# Altium PCB MAX96724_COUPON.PcbDoc (part 3 of 3)
Units mm, origin at the board's own origin, x right, y up, seen from the top; angles counter-clockwise.
Board outline 95 x 90 mm, 4 copper layers (TOP, INT1, INT2, BOT), stack 1.586 mm thick; 171 components, 127 nets, 532 pads, 121 vias.
Unrouted connection lines stored in the file: 1.
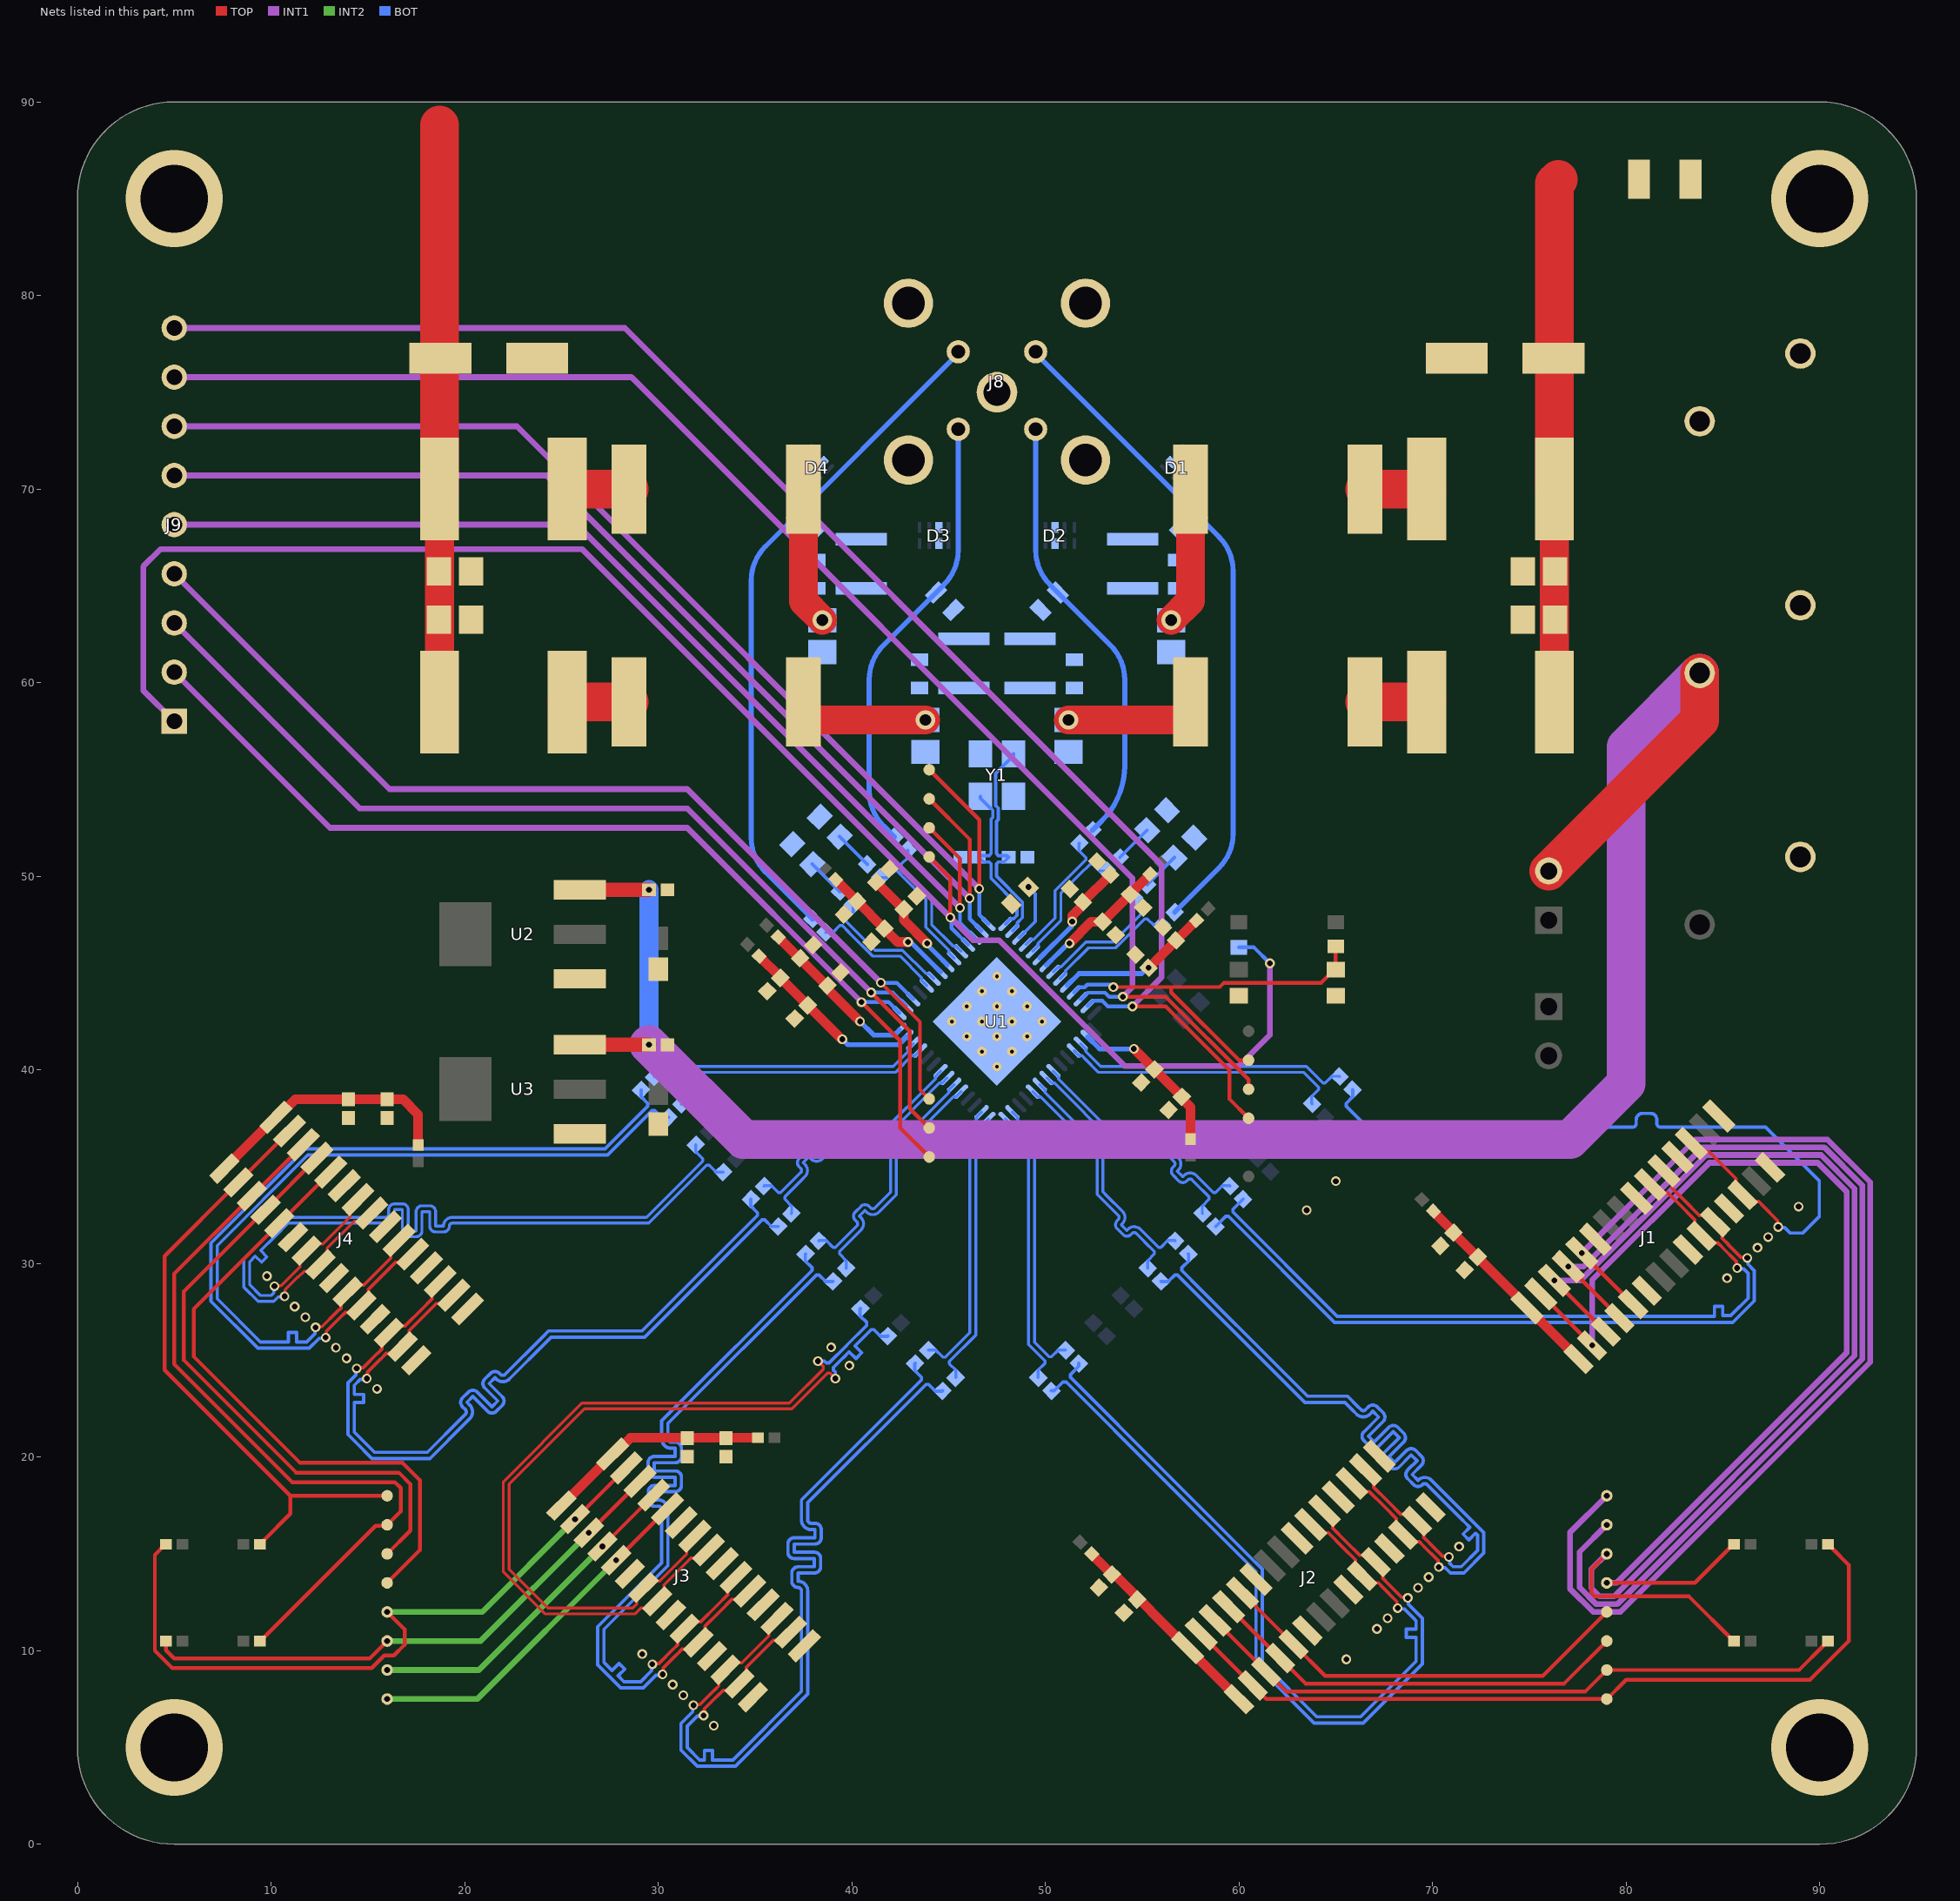
[diagram p4: the nets of this part, all layers, seen from the top]

## Via types
v1: diameter 0.5, hole 0.3, TOP to BOT, 75 vias
v2: diameter 0.5, hole 0.3, TOP to BOT, tented both sides, 22 vias
v3: diameter 0.5, hole 0.2, TOP to BOT, 16 vias
v4: diameter 1, hole 0.6, TOP to BOT, 4 vias
v5: diameter 5, hole 3.5, TOP to BOT, 4 vias

## Nets (pads, with @x,y where several pads share a name; then routed paths per layer and width w, separated by ;. In a path a pad name is that pad's centre, name@x,y a point inside that pad or via, vN(x,y) a via of type N, cw(c..) or ccw(c..) an arc to the next point about the centre after c; other vN are vias at no path point) (continued)
CSI0_D0_P: C14.2 J1.3 | length 39.2
  TOP w0.172: J1.3@83.371,36.2 83.813,35.758 84.116,35.758 84.133,35.775 84.275,35.775 85.669,34.381 85.669,34.239 85.652,34.222 85.652,33.919 J1.3@86.023,33.548 86.394,33.177 86.697,33.177 86.714,33.194 86.856,33.194 87.069,32.981 87.069,32.971 87.82,32.22 87.82,31.923 v1(87.859,31.884)
  BOT w0.172: C14.2@65.87,38.98 65.885,38.964 65.885,38.611 65.54,38.266 65.54,38.123 66.614,37.049 80.1,37.049 80.347,37.049 ccw(c80.347,37.221) 80.52,37.221 80.52,37.426 cw(c80.842,37.426) 80.842,37.749 81.268,37.749 cw(c81.268,37.426) 81.591,37.426 81.591,37.221 ccw(c81.763,37.221) 81.763,37.049 84.2,37.049 87.201,37.049 88.575,35.675 89.975,34.275 89.975,32.413 89.137,31.575 88.465,31.575 88.195,31.845 87.898,31.845 v1(87.859,31.884)
CSI0_D1_N: C17.2 J1.5 | length 39.9
  TOP w0.172: J1.5@81.957,34.786 82.399,34.344 82.399,34.041 82.382,34.024 82.382,33.881 83.024,33.24 83.775,32.488 83.918,32.488 83.935,32.505 84.238,32.505 J1.5@84.609,32.134 84.98,31.763 84.98,31.46 84.963,31.443 84.963,31.3 85.27,30.993 85.27,30.983 85.927,30.327 86.224,30.327 v1(86.263,30.288)
  BOT w0.172: C17.2@58.799,31.909 59.32,32.43 59.463,32.43 64.943,26.95 85.506,26.95 86.625,28.069 86.625,29.628 86.301,29.952 86.301,30.249 v1(86.263,30.288)
CSI0_D1_P: C16.2 J1.6 | length 39.8
  TOP w0.172: J1.6@81.25,34.078 81.692,33.636 81.994,33.636 82.011,33.653 82.154,33.653 82.701,33.106 83.547,32.26 83.547,32.117 83.53,32.1 83.53,31.798 J1.6@83.902,31.427 84.273,31.056 84.575,31.056 84.592,31.073 84.735,31.073 84.948,30.86 84.948,30.85 85.699,30.099 85.699,29.802 v1(85.738,29.763)
  BOT w0.172: C16.2@60.213,33.323 59.691,32.801 59.691,32.658 65.077,27.272 83.7,27.272 84.561,27.272 84.561,27.79 84.987,27.79 84.987,27.314 85.414,27.314 85.5,27.4 86.303,28.203 86.303,29.495 86.073,29.724 85.776,29.724 v1(85.738,29.763)
CSI0_D2_N: C19.2 J2.2 | length 39.3
  TOP w0.172: J2.2@66.541,19.344 66.983,18.902 66.983,18.6 66.966,18.583 66.966,18.44 67.647,17.759 68.359,17.047 68.502,17.047 68.519,17.064 68.821,17.064 J2.2@69.192,16.692 69.564,16.321 69.564,16.019 69.547,16.002 69.547,15.859 69.854,15.552 69.854,15.542 70.511,14.885 70.808,14.885 v1(70.846,14.846)
  BOT w0.172: C19.2@55.97,29.08 55.985,29.065 56.339,29.065 56.684,29.41 56.827,29.41 57.818,28.418 61.568,24.668 63.415,22.821 65.473,22.821 65.897,22.397 66.025,22.269 66.072,22.222 ccw(c66.422,22.572) 66.772,22.222 66.917,22.367 67.218,22.066 66.457,21.305 ccw(c66.684,21.076) 66.457,20.847 ; 66.457,20.847 66.757,20.547 ccw(c66.986,20.774) 67.154,20.499 67.166,20.499 67.976,21.308 68.277,21.007 ; 68.276,21.006 67.516,20.246 ccw(c67.743,20.017) 67.516,19.788 67.816,19.489 ccw(c68.044,19.716) 68.212,19.44 68.225,19.44 68.898,20.114 69.2,19.812 68.719,19.331 ccw(c68.947,19.103) 68.72,18.875 69.02,18.575 ccw(c69.248,18.802) 69.476,18.573 ; 69.476,18.574 cw(c69.598,18.452) 69.721,18.573 71.119,17.175 71.247,17.047 71.56,16.734 71.621,16.673 71.923,16.371 71.577,16.026 71.879,15.724 72.224,16.07 72.264,16.03 72.325,15.969 72.325,15.175 71.488,14.338 71.057,14.338 70.885,14.511 70.885,14.808 v1(70.846,14.846)
CSI0_D2_P: C18.2 J2.3 | length 39.4
  TOP w0.172: J2.3@65.834,18.637 66.276,18.195 66.578,18.195 66.595,18.212 66.738,18.212 67.513,17.437 68.131,16.819 68.131,16.676 68.114,16.659 68.114,16.357 J2.3@68.485,15.985 68.857,15.614 69.159,15.614 69.176,15.631 69.319,15.631 69.531,15.418 69.531,15.408 70.283,14.657 70.283,14.36 v1(70.321,14.321)
  BOT w0.172: C18.2@57.384,30.494 57.399,30.479 57.399,30.126 57.055,29.781 57.055,29.638 58.046,28.646 61.796,24.896 63.549,23.144 65.606,23.144 66.125,22.625 66.253,22.497 66.3,22.45 ccw(c66.422,22.572) 66.544,22.45 66.689,22.595 cw(c66.917,22.367) 67.145,22.595 67.446,22.294 cw(c67.218,22.066) 67.493,21.898 67.493,21.885 66.684,21.076 66.986,20.774 ; 66.986,20.775 67.748,21.536 cw(c67.976,21.308) 68.204,21.536 68.505,21.235 cw(c68.277,21.007) 68.552,20.839 68.552,20.826 67.743,20.017 68.044,19.716 68.67,20.341 cw(c68.898,20.114) 69.126,20.341 69.428,20.04 cw(c69.2,19.812) 69.428,19.584 68.947,19.103 69.248,18.802 ; 69.249,18.803 cw(c69.598,18.452) 69.893,18.849 69.901,18.849 69.947,18.803 ; 69.948,18.802 71.347,17.403 71.475,17.275 72.4,16.35 72.647,16.103 72.647,15.041 71.622,14.016 70.924,14.016 70.657,14.283 70.36,14.283 v1(70.321,14.321)
CSI0_D3_N: C23.2 J2.5 | length 41.2
  TOP w0.172: J2.5@64.419,17.223 64.861,16.781 64.861,16.478 64.844,16.461 64.844,16.319 65.525,15.638 66.238,14.925 66.38,14.925 66.397,14.942 66.7,14.942 J2.5@67.071,14.571 67.442,14.2 67.442,13.897 67.425,13.88 67.425,13.738 67.732,13.431 67.732,13.42 68.389,12.764 68.686,12.764 v1(68.725,12.725)
  BOT w0.172: C23.2@50.313,23.423 50.456,23.423 50.906,23.874 51.083,23.874 56.019,18.938 60.229,14.729 60.878,14.079 60.878,9.266 63.88,6.264 66.42,6.264 69.474,9.318 69.474,11.679 68.764,12.389 68.764,12.686 v1(68.725,12.725)
CSI0_D3_P: C22.2 J2.6 | length 41.1
  TOP w0.172: J2.6@63.712,16.516 64.154,16.074 64.457,16.074 64.474,16.091 64.616,16.091 65.392,15.315 66.01,14.697 66.01,14.555 65.993,14.538 65.993,14.235 J2.6@66.364,13.864 66.735,13.493 67.038,13.493 67.055,13.51 67.197,13.51 67.41,13.297 67.41,13.287 68.161,12.536 68.161,12.239 v1(68.2,12.2)
  BOT w0.172: C22.2@51.727,24.837 51.727,24.695 51.294,24.261 51.294,24.119 56.247,19.166 60.456,14.956 61.2,14.213 61.2,9.4 64.014,6.586 66.286,6.586 69.152,9.452 69.152,10.3 69.152,10.688 68.646,10.688 68.646,11.114 69.152,11.114 69.152,11.545 69.07,11.627 68.536,12.161 68.239,12.161 v1(68.2,12.2)
CSI0A_IO0: J1.11 TP1.1 | length 58.2
  TOP w0.2: v1(77.714,30.543) J1.11@80.366,27.891
  INT1 w0.3: v1(77.714,30.543) 83.576,36.405 90.399,36.405 92.605,34.199 92.605,24.901 79.704,12 78.3,12 77.1,13.2 77.1,16.1 v1(79,18)
CSI0A_IO1: J1.12 TP3.1 | length 55.3
  TOP w0.2: v1(77.007,29.836) J1.12@79.659,27.184
  INT1 w0.3: v1(77.007,29.836) 77.8,29.836 83.967,36.003 90.233,36.003 92.203,34.033 92.203,25.067 79.537,12.402 78.466,12.402 77.6,13.268 77.6,15.1 v1(79,16.5)
CSI0A_SCL: J1.13 R13.1 TP5.1 | length 63.1
  TOP w0.2: v1(76.3,29.129) J1.13@78.952,26.477 ; v1(79,15) 78.2,14.2 78.2,13 78.4,12.8 83.25,12.8 85.55,10.5 R13.1@85.575,10.5
  INT1 w0.3: v1(76.3,29.129) 77.661,29.129 84.134,35.602 90.066,35.602 91.802,33.866 91.802,25.234 79.371,12.803 78.633,12.803 78.2,13.236 78.2,14.2 v1(79,15)
CSI0A_SDA: J1.14 R7.1 TP7.1 | length 56.4
  TOP w0.2: J1.14@75.593,28.422 v1(78.245,25.77) ; v1(79,13.5) 83.55,13.5 85.55,15.5 R7.1@85.575,15.5
  INT1 w0.3: v1(78.245,25.77) 78.245,29.145 84.3,35.2 89.9,35.2 91.4,33.7 91.4,25.4 79.5,13.5 v1(79,13.5)
CSI0B_IO0: J2.11 TP2.1 | length 22
  TOP w0.2: J2.11@60.177,12.98 J2.11@62.828,10.328 64.457,8.7 75.7,8.7 TP2.1@79,12
CSI0B_IO1: J2.12 TP4.1 | length 22.1
  TOP w0.2: J2.12@59.47,12.273 J2.12@62.121,9.621 63.443,8.3 76.8,8.3 TP4.1@79,10.5
CSI0B_SCL: J2.13 R17.1 TP6.1 | length 34.3
  TOP w0.2: J2.13@58.763,11.566 J2.13@61.414,8.914 62.432,7.897 77.897,7.897 TP6.1@79,9 88.935,9 90.225,10.29 90.225,10.325 90.4,10.5 R17.1@90.425,10.5
CSI0B_SDA: J2.14 R11.1 TP8.1 | length 41.5
  TOP w0.2: J2.14@58.055,10.859 J2.14@60.707,8.207 60.718,8.207 61.425,7.5 TP8.1@79,7.5 80,8.5 89.5,8.5 91.5,10.5 91.5,14.425 90.625,15.3 90.625,15.325 90.45,15.5 R11.1@90.425,15.5
CSI1_CK_N: C41.2 J3.8 | length 41.7
  TOP w0.152: J3.8@32.601,15.202 32.159,14.76 31.843,14.76 31.817,14.785 31.691,14.785 30.296,13.39 30.296,13.264 30.321,13.238 30.321,12.921 J3.8@29.95,12.55 29.579,12.179 29.262,12.179 29.236,12.204 29.11,12.204 28.804,11.898 24.175,11.898 21.998,14.075 21.998,18.725 26.061,22.788 36.775,22.788 38.534,24.547 38.534,24.673 v1(38.254,24.954)
  BOT w0.172: v1(38.254,24.954) 38.591,24.954 38.687,24.858 38.83,24.858 39.737,25.765 39.737,25.773 40.774,26.809 40.774,26.952 40.429,27.297 40.429,27.651 C41.2@40.444,27.666
CSI1_CK_P: C38.2 J3.9 | length 41.7
  TOP w0.152: J3.9@31.894,15.909 31.452,15.467 31.452,15.15 31.478,15.125 31.478,14.999 30.082,13.603 29.956,13.603 29.931,13.629 29.614,13.629 J3.9@29.243,13.257 28.871,12.886 28.871,12.569 28.897,12.544 28.897,12.418 28.679,12.2 24.3,12.2 22.3,14.2 22.3,18.6 26.187,22.487 36.9,22.487 38.747,24.334 38.873,24.334 v1(39.154,24.054)
  BOT w0.172: v1(39.154,24.054) 39.154,24.391 39.058,24.487 39.058,24.63 39.505,25.077 39.566,25.138 39.868,25.44 40.218,25.089 40.52,25.391 40.165,25.745 40.531,26.11 41.002,26.581 41.145,26.581 41.49,26.237 41.843,26.237 C38.2@41.858,26.252
CSI1_CKALT_N: C71.1 J4.8 | length 41.7
  TOP w0.152: v1(10.701,28.299) 10.731,28.33 10.731,28.641 11.384,29.294 11.401,29.294 11.711,29.604 11.837,29.604 11.862,29.579 12.179,29.579 J4.8@12.55,29.95 12.921,30.321 12.921,30.638 12.896,30.663 12.896,30.789 14.292,32.185 14.418,32.185 14.443,32.159 14.76,32.159 J4.8@15.202,32.601
  BOT w0.152: v1(10.701,28.299) 10.67,28.269 10.359,28.269 10.134,28.045 9.328,28.045 8.598,28.775 8.598,30.225 10.756,32.383 15.7,32.383 15.927,32.383 ccw(c15.927,32.534) 16.079,32.534 16.079,32.781 cw(c16.381,32.781) 16.381,33.083 16.787,33.083 cw(c16.787,32.781) 17.089,32.781 17.089,31.683 17.494,31.683 17.494,32.676 cw(c17.796,32.676) 17.796,32.978 18.202,32.978 cw(c18.202,32.676) 18.504,32.676 18.504,31.929 18.91,31.929 cw(c19.364,31.929) 19.364,32.383 24.4,32.383 29.391,32.383 32.297,35.289 32.297,35.415 31.944,35.768 C71.1@31.944,36.136
CSI1_CKALT_P: C70.1 J4.9 | length 41.6
  TOP w0.152: v1(10.176,28.824) 10.206,28.855 10.517,28.855 11.259,29.596 11.276,29.596 11.497,29.817 11.497,29.943 11.472,29.969 11.472,30.286 J4.9@11.843,30.657 12.214,31.028 12.531,31.028 12.557,31.003 12.683,31.003 14.078,32.398 14.078,32.524 14.053,32.55 14.053,32.867 J4.9@14.495,33.309
  BOT w0.152: v1(10.176,28.824) 10.145,28.794 10.145,28.483 10.009,28.347 9.453,28.347 8.9,28.9 8.9,29.983 8.9,30.091 9.187,30.378 9.507,30.058 9.794,30.345 9.469,30.669 10.2,31.4 10.881,32.081 15.7,32.081 15.927,32.081 ccw(c15.927,32.534) 16.381,32.534 16.381,32.781 16.787,32.781 16.787,31.683 ccw(c17.089,31.683) 17.089,31.381 17.494,31.381 ccw(c17.494,31.683) 17.796,31.683 17.796,32.676 18.202,32.676 18.202,31.929 ccw(c18.504,31.929) 18.504,31.627 18.91,31.627 ccw(c18.91,31.929) 19.212,31.929 cw(c19.364,31.929) 19.364,32.081 24.4,32.081 29.516,32.081 32.511,35.075 32.636,35.075 32.99,34.722 C70.1@33.358,34.722
CSI1_D0_N: C29.2 J3.2 | length 41.5
  TOP w0.172: v1(32.346,6.654) 32.385,6.692 32.385,6.989 33.042,7.646 33.052,7.646 33.359,7.953 33.502,7.953 33.519,7.936 33.821,7.936 J3.2@34.192,8.308 34.564,8.679 34.564,8.981 34.547,8.998 34.547,9.141 35.94,10.534 36.083,10.534 36.1,10.517 36.402,10.517 J3.2@36.844,10.959
  BOT w0.172: v1(32.346,6.654) 32.308,6.615 32.011,6.615 31.5,6.104 31.5,5 32.145,4.355 32.386,4.355 32.386,4.844 32.812,4.844 32.812,4.355 33.325,4.355 33.855,4.355 37.4,7.9 37.4,10.9 37.4,13.091 ccw(c37.228,13.091) 37.228,13.263 cw(c37.228,13.585) 36.905,13.585 36.905,14.012 cw(c37.228,14.012) 37.228,14.334 38.069,14.334 38.069,14.761 37.022,14.761 cw(c37.022,15.083) 36.7,15.083 36.7,15.509 cw(c37.022,15.509) 37.022,15.832 38.1,15.832 38.1,16.258 37.895,16.258 cw(c37.895,16.753) 37.4,16.753 37.4,17 37.4,17.779 43.602,23.981 43.602,24.124 43.257,24.469 43.257,24.822 C29.2@43.273,24.837
CSI1_D0_P: C28.2 J3.3 | length 41.6
  TOP w0.172: v1(31.821,7.179) 31.86,7.217 32.157,7.217 32.908,7.969 32.918,7.969 33.131,8.181 33.131,8.324 33.114,8.341 33.114,8.643 J3.3@33.485,9.015 33.857,9.386 34.159,9.386 34.176,9.369 34.319,9.369 35.712,10.762 35.712,10.905 35.695,10.922 35.695,11.224 J3.3@36.137,11.666
  BOT w0.172: v1(31.821,7.179) 31.783,7.14 31.783,6.843 31.178,6.238 31.178,4.866 32.012,4.032 33.988,4.032 37.722,7.766 37.722,10.9 37.722,13.091 ccw(c37.228,13.091) 37.228,13.585 37.228,14.012 38.069,14.012 ccw(c38.069,14.334) 38.391,14.334 38.391,14.761 ccw(c38.069,14.761) 38.069,15.083 37.022,15.083 37.022,15.509 38.1,15.509 ccw(c38.1,15.832) 38.422,15.832 38.422,16.258 ccw(c38.1,16.258) 38.1,16.58 37.895,16.58 cw(c37.895,16.753) 37.722,16.753 37.722,17 37.722,17.645 43.83,23.753 43.973,23.753 44.318,23.408 44.672,23.408 C28.2@44.687,23.423
CSI1_D1_N: C31.2 J3.5 | length 41.6
  TOP w0.172: v1(30.225,8.775) 30.264,8.814 30.264,9.111 30.92,9.768 30.931,9.768 31.238,10.075 31.38,10.075 31.397,10.058 31.7,10.058 J3.5@32.071,10.429 32.442,10.8 32.442,11.103 32.425,11.12 32.425,11.262 33.177,12.014 33.819,12.656 33.961,12.656 33.978,12.639 34.281,12.639 J3.5@34.723,13.081
  BOT w0.172: v1(30.225,8.775) 30.186,8.736 29.889,8.736 29.231,8.078 28.066,8.078 26.878,9.266 26.878,11.234 30.178,14.534 30.178,14.8 30.178,17.291 ccw(c30.005,17.291) 30.005,17.463 29.813,17.463 cw(c29.813,17.785) 29.49,17.785 29.49,18.212 cw(c29.813,18.212) 29.813,18.534 30.878,18.534 30.878,18.961 29.8,18.961 cw(c29.8,19.283) 29.478,19.283 29.478,19.709 cw(c29.8,19.709) 29.8,20.032 30.878,20.032 30.878,20.458 30.672,20.458 cw(c30.672,20.953) 30.178,20.953 30.178,21.2 30.178,21.87 37.945,29.638 37.945,29.781 37.601,30.126 37.601,30.479 C31.2@37.616,30.494
CSI1_D1_P: C30.2 J3.6 | length 41.5
  TOP w0.172: v1(29.7,9.3) 29.739,9.339 30.036,9.339 30.787,10.09 30.797,10.09 31.01,10.303 31.01,10.445 30.993,10.462 30.993,10.765 J3.6@31.364,11.136 31.735,11.507 32.038,11.507 32.055,11.49 32.197,11.49 33.043,12.336 33.591,12.884 33.591,13.026 33.574,13.043 33.574,13.346 J3.6@34.016,13.788
  BOT w0.172: v1(29.7,9.3) 29.661,9.261 29.661,8.964 29.097,8.4 28.357,8.4 28.235,8.4 27.934,8.701 28.274,9.042 27.973,9.343 27.615,8.985 27.261,9.339 27.2,9.4 27.2,11.1 30.5,14.4 30.5,14.8 30.5,17.291 ccw(c30.005,17.291) 30.005,17.785 29.813,17.785 29.813,18.212 30.878,18.212 ccw(c30.878,18.534) 31.2,18.534 31.2,18.961 ccw(c30.878,18.961) 30.878,19.283 29.8,19.283 29.8,19.709 30.878,19.709 ccw(c30.878,20.032) 31.2,20.032 31.2,20.458 ccw(c30.878,20.458) 30.878,20.78 30.672,20.78 cw(c30.672,20.953) 30.5,20.953 30.5,21.2 30.5,21.737 38.173,29.41 38.316,29.41 38.661,29.065 39.015,29.065 C30.2@39.03,29.08
CSI1_D2_N: C33.2 J4.2 | length 41.5
  TOP w0.172: v1(14.947,24.053) 14.986,24.092 14.986,24.389 15.642,25.046 15.652,25.046 15.959,25.353 16.102,25.353 16.119,25.336 16.422,25.336 J4.2@16.793,25.707 17.164,26.078 17.164,26.381 17.147,26.398 17.147,26.541 17.899,27.292 18.54,27.934 18.683,27.934 18.7,27.917 19.003,27.917 J4.2@19.445,28.359
  BOT w0.172: v1(14.947,24.053) 14.908,24.014 14.611,24.014 14.301,23.704 14.301,23.4 14.301,23.239 14.79,23.239 14.79,22.813 14.301,22.813 14.301,22.3 14.301,21.299 15.35,20.25 18.075,20.25 19.863,22.037 20.037,22.212 ccw(c19.916,22.334) 20.037,22.457 ; 20.036,22.457 19.892,22.601 cw(c20.12,22.829) 19.891,23.056 20.194,23.359 cw(c20.422,23.131) 20.65,23.359 21.412,22.597 21.713,22.898 21.041,23.57 cw(c21.269,23.798) 21.04,24.025 21.342,24.328 cw(c21.57,24.1) 21.798,24.328 21.854,24.272 ccw(c21.975,24.394) 22.097,24.272 24.013,26.187 24.34,26.515 29.166,26.515 35.132,32.481 35.132,32.624 34.787,32.969 C33.2@34.787,33.323
CSI1_D2_P: C32.2 J4.3 | length 41.6
  TOP w0.172: v1(14.422,24.578) 14.461,24.617 14.758,24.617 15.509,25.368 15.519,25.368 15.732,25.581 15.732,25.724 15.715,25.741 15.715,26.043 J4.3@16.086,26.414 16.457,26.785 16.759,26.785 16.776,26.768 16.919,26.768 17.765,27.614 18.312,28.162 18.312,28.305 18.295,28.322 18.295,28.624 J4.3@18.737,29.066
  BOT w0.172: v1(14.422,24.578) 14.383,24.539 14.383,24.242 13.979,23.838 13.979,21.165 14.347,20.797 15.216,19.928 18.209,19.928 20.09,21.81 20.265,21.984 ccw(c19.916,22.334) 20.313,22.629 20.313,22.637 20.266,22.683 ; 20.265,22.684 20.12,22.829 20.422,23.131 21.184,22.369 ccw(c21.412,22.597) 21.639,22.368 21.941,22.67 ccw(c21.713,22.898) 21.941,23.126 21.269,23.798 21.57,24.1 21.626,24.044 ccw(c21.975,24.394) 22.325,24.044 24.24,25.96 24.474,26.193 29.3,26.193 35.36,32.253 35.503,32.253 35.848,31.909 C32.2@36.201,31.909
CSI1_D3_N: C37.2 J4.5 | length 43.4
  TOP w0.172: v1(12.826,26.174) 12.864,26.213 12.864,26.51 13.521,27.167 13.531,27.167 13.838,27.474 13.981,27.474 13.998,27.457 14.3,27.457 J4.5@14.672,27.828 15.043,28.2 15.043,28.502 15.026,28.519 15.026,28.662 16.419,30.055 16.562,30.055 16.579,30.038 16.881,30.038 J4.5@17.323,30.48
  BOT w0.172: v1(12.826,26.174) 12.787,26.136 12.49,26.136 11.982,25.628 9.316,25.628 6.9,28.044 6.9,31.056 11.766,35.922 27.259,35.922 29.46,38.123 29.46,38.266 29.115,38.611 C37.2@29.115,38.964
CSI1_D3_P: C36.2 J4.6 | length 43.3
  TOP w0.172: v1(12.301,26.699) 12.339,26.738 12.636,26.738 13.387,27.489 13.397,27.489 13.61,27.702 13.61,27.845 13.593,27.862 13.593,28.164 J4.6@13.964,28.536 14.336,28.907 14.638,28.907 14.655,28.89 14.798,28.89 16.191,30.283 16.191,30.426 16.174,30.443 16.174,30.745 J4.6@16.616,31.187
  BOT w0.172: v1(12.301,26.699) 12.262,26.661 12.262,26.364 11.848,25.95 11.838,25.95 11.325,25.95 11.325,26.439 10.899,26.439 10.899,25.95 10,25.95 9.45,25.95 7.222,28.178 7.222,30.922 11.9,35.6 27.393,35.6 29.688,37.895 29.831,37.895 30.176,37.55 C36.2@30.529,37.55
CSI1A_IO0: J3.11 TP10.1 | length 18.5
  TOP w0.2: v1(27.828,14.672) J3.11@30.48,17.323
  INT2 w0.3: v1(16,7.5) 20.657,7.5 v1(27.828,14.672)
CSI1A_IO1: J3.12 TP12.1 | length 17.5
  TOP w0.2: v1(27.121,15.379) J3.12@29.773,18.03
  INT2 w0.3: v1(16,9) 20.743,9 v1(27.121,15.379)
CSI1A_SCL: J3.13 R15.1 TP14.1 | length 28.9
  TOP w0.2: R15.1@4.575,10.5 4.575,10.025 5,9.6 15.1,9.6 v1(16,10.5) ; v1(26.414,16.086) J3.13@29.066,18.737
  INT2 w0.3: v1(16,10.5) 20.828,10.5 v1(26.414,16.086)
CSI1A_SDA: J3.14 R9.1 TP16.1 | length 37
  TOP w0.2: R9.1@4.575,15.5 4.55,15.5 4,14.95 4,10 4.9,9.1 15.2,9.1 15.85,9.75 16.35,9.75 16.9,10.3 16.9,11.1 v1(16,12) ; v1(25.707,16.793) J3.14@28.359,19.445
  INT2 w0.3: v1(16,12) 20.914,12 v1(25.707,16.793)
CSI1B_IO0: J4.11 TP11.1 | length 32.8
  TOP w0.2: J4.11@13.081,34.723 J4.11@10.429,32.071 6,27.642 6,25.2 11.5,19.7 16.8,19.7 17.7,18.8 17.7,15.2 TP11.1@16,13.5
CSI1B_IO1: J4.12 TP13.1 | length 31.7
  TOP w0.2: J4.12@12.373,35.43 J4.12@9.722,32.778 5.5,28.556 5.5,25 11.3,19.2 16.6,19.2 17.2,18.6 17.2,16.2 TP13.1@16,15
CSI1B_SCL: J4.13 R18.1 TP15.1 | length 39.7
  TOP w0.2: R18.1@9.425,10.5 9.45,10.5 15.4,16.45 15.95,16.45 TP15.1@16,16.5 16.7,17.2 16.7,18.4 16.4,18.7 11.1,18.7 5,24.8 5,29.471 J4.13@9.015,33.485 J4.13@11.666,36.137
CSI1B_SDA: J4.14 R12.1 TP17.1 | length 32.4
  TOP w0.2: R12.1@9.425,15.5 9.45,15.5 9.625,15.675 9.625,15.7 11,17.075 11,18 ; J4.14@10.959,36.844 J4.14@8.308,34.192 4.5,30.385 4.5,24.5 11,18 ; TP17.1@16,18 11,18
DA0_N: C15.1 U1.32 | length 14.4
  BOT w0.152: U1.32@51.477,40.997 51.744,40.731 51.884,40.731 52.045,40.57 52.742,39.873 63.352,39.873 64.119,39.106 64.119,38.981 63.763,38.625 63.763,38.257 C15.1@63.779,38.242
DA0_P: C14.1 U1.31 | length 14.4
  BOT w0.152: U1.31@51.831,41.351 52.097,41.085 52.097,40.945 52.346,40.695 52.867,40.175 63.477,40.175 64.332,39.32 64.458,39.32 64.81,39.672 65.178,39.672 C14.1@65.193,39.656
DA1_N: C17.1 U1.36 | length 12.6
  BOT w0.152: U1.36@50.063,39.583 50.33,39.317 50.47,39.317 53.587,36.2 55.708,36.2 56.154,35.754 56.654,35.254 cw(c56.548,35.145) 56.655,35.038 56.601,34.984 ccw(c56.813,34.769) 56.6,34.556 56.887,34.269 ccw(c57.1,34.482) 57.314,34.269 57.369,34.324 cw(c57.476,34.217) 57.584,34.324 ; 57.585,34.323 57.744,34.164 58.46,33.448 58.46,33.322 58.107,32.969 58.107,32.601 C17.1@58.122,32.585
DA1_P: C16.1 U1.35 | length 12.6
  BOT w0.152: U1.35@50.417,39.937 50.683,39.67 50.683,39.53 53.712,36.502 55.833,36.502 56.367,35.967 56.913,35.422 56.913,35.415 cw(c56.548,35.145) 56.869,34.825 56.813,34.769 57.1,34.482 57.156,34.538 cw(c57.476,34.217) 57.746,34.582 57.753,34.582 57.958,34.377 58.673,33.661 58.799,33.661 59.153,34.015 59.521,34.015 C16.1@59.536,34
DA2_N: C19.1 U1.38 | length 12.6
  BOT w0.152: U1.38@49.356,38.876 49.622,38.61 49.762,38.61 52.675,35.697 52.675,33.573 52.924,33.324 53.764,32.484 cw(c53.658,32.376) 53.765,32.268 53.711,32.214 ccw(c53.924,32) 53.71,31.786 53.997,31.499 ccw(c54.211,31.713) 54.424,31.499 54.479,31.554 cw(c54.586,31.447) 54.694,31.554 54.854,31.394 55.364,30.884 55.367,30.884 55.632,30.619 55.632,30.494 55.278,30.14 55.278,29.772 C19.1@55.293,29.757
DA2_P: C18.1 U1.37 | length 12.6
  BOT w0.152: U1.37@49.71,39.23 49.976,38.963 49.976,38.823 52.977,35.822 52.977,33.698 53.138,33.538 54.023,32.652 54.023,32.645 cw(c53.658,32.376) 53.979,32.055 53.924,32 54.211,31.713 54.266,31.768 cw(c54.586,31.447) 54.856,31.812 54.863,31.812 55.068,31.607 55.489,31.186 55.492,31.186 55.845,30.833 55.971,30.833 56.324,31.186 56.692,31.186 C18.1@56.708,31.171
DA3_N: C23.1 U1.42 | length 14.4
  BOT w0.152: U1.42@47.942,37.462 48.208,37.196 48.348,37.196 49.137,36.407 49.137,25.811 49.98,24.968 49.98,24.842 49.621,24.483 49.621,24.115 C23.1@49.636,24.1
DA3_P: C22.1 U1.41 | length 14.4
  BOT w0.152: U1.41@48.295,37.815 48.562,37.549 48.562,37.409 49.438,36.532 49.438,25.937 50.194,25.181 50.319,25.181 50.667,25.529 51.036,25.529 C22.1@51.051,25.514
DB0_N: C29.1 U1.44 | length 14.5
  BOT w0.152: C29.1@43.949,25.514 43.964,25.529 44.333,25.529 44.705,25.157 44.83,25.157 46.1,26.427 46.1,37.071 46.438,37.409 46.438,37.549 U1.44@46.705,37.815
DB0_P: C28.1 U1.43 | length 14.4
  BOT w0.152: C28.1@45.364,24.1 45.379,24.115 45.379,24.483 45.044,24.818 45.044,24.944 46.402,26.302 46.402,36.946 46.652,37.196 46.792,37.196 U1.43@47.058,37.462
DB1_N: C31.1 U1.48 | length 12.7
  BOT w0.152: C31.1@38.292,31.171 38.308,31.186 38.676,31.186 39.029,30.833 39.155,30.833 40.102,31.78 40.262,31.94 ccw(c40.155,32.048) 40.262,32.155 ; 40.261,32.156 40.182,32.235 cw(c40.395,32.449) 40.182,32.662 40.469,32.949 cw(c40.682,32.736) 40.896,32.949 40.976,32.869 ccw(c41.084,32.976) 41.191,32.869 41.811,33.489 42,33.678 42,35.799 43.475,37.274 45.024,38.823 45.024,38.963 U1.48@45.29,39.23
DB1_P: C30.1 U1.47 | length 12.7
  BOT w0.152: C30.1@39.707,29.757 39.722,29.772 39.722,30.14 39.368,30.494 39.368,30.619 40.315,31.566 40.476,31.727 ccw(c40.155,32.048) 40.52,32.317 40.52,32.324 40.395,32.449 40.682,32.736 40.763,32.655 ccw(c41.084,32.976) 41.404,32.655 42.025,33.275 42.302,33.553 42.302,35.674 43.6,36.972 45.238,38.61 45.378,38.61 U1.47@45.644,38.876
DB2_N: C33.1 U1.50 | length 12.7
  BOT w0.152: C33.1@35.464,34 35.479,34.015 35.847,34.015 36.201,33.661 36.327,33.661 37.204,34.538 37.364,34.699 ccw(c37.257,34.806) 37.364,34.914 ; 37.363,34.914 37.284,34.994 cw(c37.497,35.207) 37.284,35.421 37.571,35.708 cw(c37.784,35.494) 37.998,35.708 38.078,35.628 ccw(c38.185,35.735) 38.293,35.628 39.083,36.417 39.304,36.638 41.425,36.638 44.317,39.53 44.317,39.67 U1.50@44.583,39.937
DB2_P: C32.1 U1.49 | length 12.7
  BOT w0.152: C32.1@36.878,32.585 36.893,32.601 36.893,32.969 36.54,33.322 36.54,33.448 37.417,34.325 37.577,34.485 ccw(c37.257,34.806) 37.622,35.076 37.622,35.083 37.497,35.207 37.784,35.494 37.864,35.414 ccw(c38.185,35.735) 38.506,35.414 39.296,36.204 39.429,36.337 41.55,36.337 44.53,39.317 44.67,39.317 U1.49@44.937,39.583
DB3_N: C37.1 U1.54 | length 14.4
  BOT w0.152: C37.1@29.792,39.641 29.807,39.656 30.175,39.656 30.502,39.33 30.628,39.33 31.473,40.175 42.133,40.175 42.903,40.945 42.903,41.085 U1.54@43.169,41.351
DB3_P: C36.1 U1.53 | length 14.5
  BOT w0.152: C36.1@31.206,38.227 31.221,38.242 31.221,38.61 30.841,38.99 30.841,39.116 31.598,39.873 42.258,39.873 43.116,40.731 43.256,40.731 U1.53@43.523,40.997
GND: C1.2 C2.2 C3.1 C4.1 C5.1 C6.2 C7.2 C8.2 C9.2 C10.2 C11.2 C12.2 C13.2 C42.1 C43.1 C44.1 C45.2 C46.1 C47.1 C48.1 C49.1 C50.1 C51.1 C52.1 C53.1 C54.1 C55.1 C56.1 C57.1 C58.1 C59.2 C60.1 C61.1 C62.1 C63.1 C64.2 C65.2 C66.2 C67.2 C72.1 D1.3 D1.8 D2.3 D2.8 D3.3 D3.8 D4.3 D4.8 J1.1 J1.4 J1.7 J1.10 J2.1 J2.4 J2.7 J2.10 J3.1 J3.4 J3.7 J3.10 J4.1 J4.4 J4.7 J4.10 J5.2 J6.2 J7.2 J8.MH1 J8.MH2 J8.MH3 J8.MH4 J8.MH5 R27.1 R29.1 R30.1 R34.1 R35.1 R36.1 R37.1 U1.57 U2.1 U3.1 Y1.2 Y1.4
  other v1: 63.5,32.75 65,34.25
  other v2: 32.875,6.125 31.3,7.7 30.75,8.25 65.55,9.55 29.175,9.825 67.125,11.125 67.675,11.675 69.25,13.25 69.8,13.8 71.375,15.375 15.476,23.524 39.875,24.725 13.901,25.099 13.351,25.649 38.931,25.669 11.776,27.224 11.226,27.774 85.213,29.238 9.789,29.349 86.788,30.813 87.338,31.363 88.913,32.938
  other v3: 47.5,40.167 46.722,40.944 48.278,40.944 45.944,41.722 47.5,41.722 49.056,41.722 45.167,42.5 46.722,42.5 48.278,42.5 49.833,42.5 45.944,43.278 47.5,43.278 49.056,43.278 46.722,44.056 48.278,44.056 47.5,44.833
  other v5: 5,5 90,5 5,85 90,85
LO_VCC: C44.2 C58.2 J6.1 P1.2 U2.3 U3.3 | length 105.1
  TOP w0.75: U3.3@25.95,41.3 v1(29.521,41.3) ; U2.3@25.95,49.3 v1(29.521,49.3)
  TOP w2: P1.2@76,50.27 83.8,58.07 J6.1@83.8,60.5
  INT1 w2: v1(29.521,41.3) 34.421,36.4 77.1,36.4 80,39.3 80,56.7 J6.1@83.8,60.5
  BOT w1: v1(29.521,41.3) v1(29.521,49.3)
MFP0: J9.2 TP26.1 U1.1 | length 54.2
  TOP w0.2: v1(40.5,43.5) 42.5,41.5 42.5,37 TP26.1@44,35.5
  INT1 w0.3: J9.2@5,60.54 13.04,52.5 31.5,52.5 v1(40.5,43.5)
  BOT w0.2: v1(40.5,43.5) 41.904,43.5 U1.1@42.462,42.942
MFP1: J9.3 TP28.1 U1.2 | length 54.3
  TOP w0.2: v1(41,44) 43,42 43,38 TP28.1@44,37
  INT1 w0.3: J9.3@5,63.08 14.58,53.5 31.5,53.5 v1(41,44)
  BOT w0.2: v1(41,44) 42.111,44 U1.2@42.815,43.295
MFP2: J9.4 TP30.1 U1.3 | length 54.3
  TOP w0.2: v1(41.5,44.5) 43.523,42.477 43.523,38.977 TP30.1@44,38.5
  INT1 w0.3: J9.4@5,65.62 16.12,54.5 31.5,54.5 v1(41.5,44.5)
  BOT w0.2: v1(41.5,44.5) 42.318,44.5 U1.3@43.169,43.649
MFP3: J9.5 TP23.1 U1.12 | length 55.4
  TOP w0.2: TP23.1@44,52.5 45.586,50.914 45.586,48.374 v1(45.591,48.369)
  INT1 w0.3: J9.5@5,68.16 25.8,68.16 v1(45.591,48.369)
  BOT w0.2: v1(45.591,48.369) 45.591,47.591 U1.12@46.351,46.831
MFP4: J9.6 TP25.1 U1.13 | length 58.1
  TOP w0.2: TP25.1@44,54 46.086,51.914 v1(46.086,48.864)
  INT1 w0.3: J9.6@5,70.7 24.25,70.7 v1(46.086,48.864)
  BOT w0.2: v1(46.086,48.864) 46.091,48.859 46.091,47.798 U1.13@46.705,47.185
MFP5: J9.7 TP27.1 U1.14 | length 60.7
  TOP w0.2: TP27.1@44,55.5 46.586,52.914 v1(46.586,49.359)
  INT1 w0.3: J9.7@5,73.24 22.705,73.24 v1(46.586,49.359)
  BOT w0.2: v1(46.586,49.359) 46.586,48.62 46.581,48.615 46.581,48.015 U1.14@47.058,47.538
MFP6: R31.1 R34.2 TP29.1 U1.25 | length 21
  TOP w0.2: v1(53.51,44.273) 53.515,44.278 56.5,44.278 ; TP29.1@60.5,40.5 60,40.5 56.5,44 56.5,44.278 ; R31.1@65,46.375 R34.2@65,45.175 64.925,45.175 64.25,44.5 59.227,44.5 59.004,44.278 56.5,44.278
  BOT w0.2: U1.25@51.477,44.003 51.735,44.26 52.029,44.26 52.168,44.399 53.303,44.399 53.429,44.273 v1(53.51,44.273)
MFP7: J9.8 TP31.1 U1.26 | length 77.7
  TOP w0.2: v1(54.005,43.778) 56.222,43.778 60.5,39.5 TP31.1@60.5,39
  INT1 w0.3: J9.8@5,75.78 28.62,75.78 54.5,49.9 54.5,44.272 v1(54.005,43.778)
  BOT w0.2: U1.26@51.831,43.649 51.845,43.649 52.18,43.985 53.088,43.985 53.301,43.773 54,43.773 v1(54.005,43.778)
MFP8: J9.9 TP33.1 U1.27 | length 82.2
  TOP w0.2: v1(54.5,43.278) 54.505,43.283 56.217,43.283 59.502,39.998 59.502,39.502 59.5,39.5 59.5,38.5 TP33.1@60.5,37.5
  INT1 w0.3: J9.9@5,78.32 28.28,78.32 56,50.6 56,44.777 v1(54.5,43.278)
  BOT w0.2: U1.27@52.185,43.295 52.442,43.553 52.477,43.553 52.485,43.561 52.945,43.561 53.228,43.278 v1(54.5,43.278)
NetC6_1: C6.1 C7.1 J1.15 R5.1 | length 10.7
  TOP w0.5: R5.1@70.051,32.699 70.051,32.664 71.088,31.626 C7.1@71.088,31.588 71.088,31.55 74.886,27.753 J1.15@74.886,27.714 J1.15@77.538,25.063
NetC8_1: C8.1 C9.1 J2.15 R6.1 | length 10.7
  TOP w0.5: R6.1@52.401,14.999 52.401,14.988 53.438,13.95 C9.1@53.438,13.938 53.561,13.939 J2.15@57.348,10.152 J2.15@60,7.5
NetC10_1: C10.1 C11.1 J3.15 R23.1 | length 11.6
  TOP w0.5: J3.15@25,17.5 J3.15@27.652,20.152 27.722,20.152 28.571,21 R23.1@35.15,21
NetC12_1: C12.1 C13.1 J4.15 R24.1 | length 13.4
  TOP w0.5: J4.15@7.601,34.899 J4.15@10.252,37.551 10.323,37.551 11.25,38.479 C12.1@14,38.479 C13.1@16,38.479 16.821,38.479 17.6,37.7 R24.1@17.6,36.125
NetC25_2: C25.2 R29.2 | length 2
  BOT w0.172: C25.2@55.263,49.556 R29.2@56.675,50.968
NetC26_2: C26.2 R30.2 | length 2
  BOT w0.172: C26.2@53.849,50.97 R30.2@55.26,52.382
NetC39_2: C39.2 R36.2 | length 2
  BOT w0.172: R36.2@39.368,52.046 C39.2@40.798,50.617
NetC40_2: C40.2 R37.2 | length 2
  BOT w0.172: R37.2@37.954,50.632 C40.2@39.383,49.202
NetC46_2: C46.2 C47.2 U1.8 | length 5.8
  TOP w0.5: C46.2@41.262,49.697 41.316,49.644 41.331,49.644 42.677,48.298 C47.2@42.692,48.298 42.677,48.283 42.677,48.161 42.692,48.146 42.692,47.733 v1(43.894,46.531)
  BOT w0.25: v1(43.894,46.531) 43.942,46.483 43.942,46.412 U1.8@44.937,45.417
NetC48_2: C48.2 C49.2 U1.20 | length 5.8
  TOP w0.5: v1(51.389,47.662) 51.389,47.964 51.995,48.57 51.995,48.723 C48.2@53.354,50.081
  BOT w0.254: U1.20@49.71,45.77 51.342,47.403 51.342,47.615 v1(51.389,47.662)
NetC50_2: C50.2 C51.2 R38.2 U1.55 | length 9.7
  TOP w0.5: R38.2@35.214,45.876 36.328,44.763 36.328,44.732 39.479,41.581 v1(39.51,41.581)
  BOT w0.254: v1(39.51,41.581) 39.793,41.298 42.409,41.298 U1.55@42.815,41.705
NetC52_2: C52.2 C53.2 R39.2 U1.56 | length 8.6
  TOP w0.5: R39.2@36.204,46.866 38.717,44.354 C53.2@38.747,44.354 38.732,44.338 38.732,44.217 38.747,44.201 38.747,44.182 v1(40.429,42.5)
  BOT w0.254: v1(40.429,42.5) 41.136,41.793 42.197,41.793 U1.56@42.462,42.058
NetC54_2: C54.2 C55.2 R40.2 U1.7 | length 7.4
  TOP w0.5: R40.2@39.174,49.836 39.174,49.822 40.28,48.715 40.28,48.7 C55.2@41.688,47.293 42.38,46.601 v1(42.904,46.601)
  BOT w0.25: v1(42.904,46.601) 42.952,46.553 43.093,46.553 U1.7@44.583,45.063
NetC56_2: C56.2 C57.2 R41.2 U1.21 | length 7.3
  TOP w0.5: v1(51.248,46.531) 52.364,47.647 52.808,47.647 52.823,47.662 52.945,47.662 C57.2@52.96,47.647 54.367,49.053 54.367,49.069 55.402,50.104 R41.2@55.402,50.119
  BOT w0.254: U1.21@50.063,45.417 51.13,46.483 51.201,46.483 v1(51.248,46.531)
NetC60_2: C60.2 C61.2 R42.2 U1.24 | length 8.1
  TOP w0.5: v1(55.334,45.273) 55.349,45.273 57.791,47.715 R42.2@57.806,47.715
  BOT w0.254: U1.24@51.124,44.356 51.743,44.975 54.969,44.975 55.267,45.273 v1(55.334,45.273)
NetC62_2: C62.2 C63.2 R43.2 U1.30 | length 8.6
  TOP w0.102: C63.2@55.561,40.096 55.561,40.025 C63.2@55.632,40.025
  TOP w0.5: v1(54.571,41.086) C63.2@55.561,40.096 ; C63.2@55.632,40.025 C62.2@57.047,38.611 57.068,38.59 57.068,38.51 57.5,38.077 R43.2@57.5,36.425
  BOT w0.25: U1.30@52.185,41.705 52.803,41.086 v1(54.571,41.086)
NetC64_1: C64.1 L1.1 L9.2 R44.1 | length 7.2
  TOP w1.5: v4(56.5,63.226) 57.5,64.226 L9.2@57.5,70
NetC65_1: C65.1 L3.1 L10.2 R45.1 | length 7.1
  TOP w1.5: v4(51.2,58.076) 57.35,58.076 57.5,58.226 L10.2@57.5,59
NetC66_1: C66.1 L5.1 L11.2 R46.1 | length 7.2
  TOP w1.5: L11.2@37.5,70 37.5,64.204 v4(38.478,63.226)
NetC67_1: C67.1 L7.1 L12.2 R47.1 | length 7.1
  TOP w1.5: L12.2@37.5,59 37.5,58.226 37.65,58.076 v4(43.8,58.076)
NetF2_2: F2.2 L9.1 | length 3.2
  TOP w2: L9.1@66.5,70 F2.2@69.7,70
NetF3_2: F3.2 L10.1 | length 3.2
  TOP w2: L10.1@66.5,59 F3.2@69.7,59
NetF4_2: F4.2 L11.1 | length 3.2
  TOP w2: F4.2@25.3,70 L11.1@28.5,70
NetF5_2: F5.2 L12.1 | length 3.2
  TOP w2: F5.2@25.3,59 L12.1@28.5,59
NetL1_2: L1.2 L2.1 R44.2
NetL3_2: L3.2 L4.1 R45.2
NetL5_2: L5.2 L6.1 R46.2
NetL7_2: L7.2 L8.1 R47.2
nPWDN: J9.1 R28.1 TP32.1 U1.11 | length 89.9
  TOP w0.2: TP32.1@44,51 45.091,49.909 v1(45.091,47.874)
  INT1 w0.3: J9.1@5,58 3.4,59.6 3.4,66 4.3,66.9 26.065,66.9 v1(45.091,47.874) 46.265,46.7 47.6,46.7 54.1,40.2 60,40.2 61.6,41.8 v1(61.6,45.5)
  BOT w0.2: v1(45.091,47.874) 45.148,47.817 45.148,47.327 U1.11@45.997,46.477 ; R28.1@60,46.325 60.775,46.325 v1(61.6,45.5)
PoC_A: C20.2 D1.1 D1.10 J8.2 L2.2 | length 34.1
  BOT w0.261: J8.2@49.5,77 58.956,67.544 cw(c57.16,65.748) 59.7,65.748 59.7,52.2 cw(c57.2,52.2) 58.968,50.432 C20.2@56.677,48.142
PoC_B: C21.2 D2.5 D2.6 J8.1 L4.2 | length 22.9
  BOT w0.261: J8.1@49.5,73 49.5,66.852 ccw(c52.04,66.852) 50.244,65.056 53.356,61.944 cw(c51.56,60.148) 54.1,60.148 54.1,55.708 ; C21.2@52.408,52.357 52.928,52.878 ccw(c50.099,55.707) 54.1,55.707
PoC_C: C34.2 D3.1 D3.10 J8.4 L8.2 | length 23.1
  BOT w0.261: C34.2@42.212,52.031 41.644,52.599 cw(c43.44,54.395) 40.9,54.395 40.9,60.148 cw(c43.44,60.148) 41.644,61.944 44.756,65.056 ccw(c42.96,66.852) 45.5,66.852 J8.4@45.5,73
PoC_D: C35.2 D4.5 D4.6 J8.3 L6.2 | length 34.7
  BOT w0.261: C35.2@37.969,47.788 35.544,50.213 cw(c37.34,52.009) 34.8,52.009 34.8,65.248 cw(c37.34,65.248) 35.544,67.044 J8.3@45.5,77
PoC_PWR: C1.1 C2.1 C3.2 C4.2 C5.2 C72.2 F1.1 F2.1 F3.1 F4.1 F5.1 | length 56.9
  TOP w1.5: F5.1@18.7,59 F4.1@18.7,70 ; F3.1@76.3,59 F2.1@76.3,70
  TOP w2: F4.1@18.7,70 18.7,88.8 ; F2.1@76.3,70 76.3,85.8 76.5,86
SIOA_N: C25.1 U1.22 | length 6.7
  BOT w0.152: U1.22@50.417,45.063 50.683,45.33 50.823,45.33 52.096,46.602 53.502,46.602 53.988,47.088 53.996,47.088 54.924,48.017 54.924,48.142 54.571,48.496 54.571,48.864 C25.1@54.586,48.879
SIOA_P: C20.1 U1.23 | length 6.7
  BOT w0.152: U1.23@50.77,44.71 51.037,44.976 51.037,45.116 52.221,46.3 53.627,46.3 54.113,46.787 54.121,46.787 55.138,47.803 55.264,47.803 55.617,47.45 55.985,47.45 C20.1@56,47.465
SIOB_N: C26.1 U1.19 | length 6.7
  BOT w0.152: U1.19@49.356,46.124 49.622,46.39 49.622,46.53 50.802,47.71 50.802,49.124 51.768,50.09 52.31,50.632 52.435,50.632 52.789,50.278 53.157,50.278 C26.1@53.172,50.293
SIOB_P: C21.1 U1.18 | length 6.7
  BOT w0.152: U1.18@49.003,46.477 49.269,46.744 49.409,46.744 50.5,47.835 50.5,49.249 51.466,50.215 52.096,50.845 52.096,50.971 51.743,51.324 51.743,51.692 C21.1@51.758,51.708
SIOC_N: C39.1 U1.9 | length 6.8
  BOT w0.152: C39.1@41.474,49.94 41.49,49.925 41.858,49.925 42.211,50.278 42.337,50.278 42.814,49.801 42.824,49.801 43.825,48.8 43.825,47.376 45.024,46.177 45.024,46.037 U1.9@45.29,45.77
SIOC_P: C34.1 U1.10 | length 6.8
  BOT w0.152: C34.1@42.889,51.354 42.904,51.339 42.904,50.971 42.55,50.617 42.55,50.491 42.939,50.103 42.949,50.103 44.127,48.925 44.127,47.501 45.238,46.39 45.378,46.39 U1.10@45.644,46.124
SIOD_N: C40.1 U1.6 | length 6.8
  BOT w0.152: C40.1@40.06,48.526 40.075,48.51 40.075,48.142 39.722,47.789 39.722,47.663 40.174,47.211 40.174,47.201 41.198,46.177 42.622,46.177 43.823,44.976 43.963,44.976 U1.6@44.23,44.71
SIOD_P: C35.1 U1.5 | length 6.8
  BOT w0.152: C35.1@38.646,47.111 38.661,47.096 39.029,47.096 39.383,47.45 39.509,47.45 39.872,47.086 39.872,47.076 41.073,45.875 42.497,45.875 43.61,44.762 43.61,44.622 U1.5@43.876,44.356
VCC: F1.2 J5.1
X25_N: C43.2 U1.16 Y1.3 | length 11.3
  BOT w0.172: U1.16@48.295,47.185 48.558,47.447 48.558,47.607 48.814,47.863 48.814,48.662 47.473,50.003 47.473,50.634 47.574,50.735 47.857,50.735 C43.2@48.107,50.985 48.022,51.071 47.574,51.071 47.473,51.172 47.473,52.844 47.562,52.933 47.562,53.527 47.438,53.651 47.438,55.316 48.35,56.228 Y1.3@48.35,56.328
X25_P: C42.2 U1.15 Y1.1 | length 8.8
  BOT w0.172: Y1.1@46.65,54.128 46.65,54.028 47.164,53.514 47.187,53.514 47.288,53.413 47.288,53.047 47.199,52.957 47.199,51.172 47.098,51.071 46.65,51.071 C42.2@46.564,50.985 46.814,50.735 47.098,50.735 47.199,50.634 47.199,49.89 48.541,48.548 48.541,47.977 48.364,47.8 48.204,47.8 U1.15@47.942,47.538
XRES: R27.2 U1.17 | length 3.1
  BOT w0.172: U1.17@48.649,46.831 49.48,47.662 49.48,49.094 v1(49.126,49.448)
pads on no net: D1.2 D1.4 D1.5 D1.6 D1.7 D1.9 D2.1 D2.2 D2.4 D2.7 D2.9 D2.10 D3.2 D3.4 D3.5 D3.6 D3.7 D3.9 D4.1 D4.2 D4.4 D4.7 D4.9 D4.10

## Polygon pours and split planes (outlines as drawn)
GND on BOT "GND_L04_P019" (solid, pour order 19): 0,5 0,85 cw(c5,85) 5,90 90,90 cw(c90,85) 95,85 95,5 cw(c90,5) 90,0 5,0 cw(c5,5)
NetL3_2 on BOT "NETL3_2_L04_P001" (solid, pour order 1): 51.95,61.505 51.95,60.855 51.05,60.855 47.875,61.945 47.875,62.595 50.525,62.595
NetL7_2 on BOT "NETL7_2_L04_P000" (solid, pour order 0): 43.05,61.505 43.05,60.855 43.95,60.855 47.125,61.945 47.125,62.595 44.475,62.595
NetL5_2 on BOT "NETL5_2_L04_P018" (solid, pour order 18): 41.825,67.74 38.183,68.338 37.462,67.617 37.772,66.65 37.772,66 38.672,66 41.825,67.09
NetL1_2 on BOT "NETL1_2_L04_P014" (solid, pour order 14): 53.175,67.74 56.817,68.338 57.538,67.617 57.228,66.65 57.228,66 56.328,66 53.175,67.09
NetL7_2 on BOT "NETL7_2_L04_P009" (solid, pour order 9): 47.125,61.945 47.125,62.595 45.836,63.884 45.836,63.885 45.383,64.338 44.662,63.617 44.475,62.595 44.475,61.945
NetL3_2 on BOT "NETL3_2_L04_P008" (solid, pour order 8): 47.875,61.945 47.875,62.595 49.164,63.884 49.164,63.885 49.617,64.338 50.338,63.617 50.525,62.595 50.525,61.945
NetC65_1 on BOT "NETC65_1_L04_P006" (solid, pour order 6): 50.472,57.453 51.928,57.453 51.928,60.055 47.875,60.055 47.875,59.405
NetC67_1 on BOT "NETC67_1_L04_P005" (solid, pour order 5): 44.528,57.453 43.072,57.453 43.072,60.055 47.125,60.055 47.125,59.405
NetC66_1 on BOT "NETC66_1_L04_P003" (solid, pour order 3): 39.228,62.598 37.772,62.598 37.772,65.2 41.825,65.2 41.825,64.55
NetC64_1 on BOT "NETC64_1_L04_P002" (solid, pour order 2): 55.772,62.598 57.228,62.598 57.228,65.2 53.175,65.2 53.175,64.55
GND on TOP "GND_L01_P021" (solid, pour order 21): 0,5 0,85 cw(c5,85) 5,90 90,90 cw(c90,85) 95,85 95,5 cw(c90,5) 90,0 5,0 cw(c5,5)
VCC on TOP "VCC_L01_P017" (solid, pour order 17): 82.5,90 95,90 95,79 86.5,79 86.5,71.5 82.5,71.5
PoC_PWR on TOP "POC_PWR_L01_P020" (solid, pour order 20): 81.5,90 81.5,82 17.75,82 17.75,90
GND on INT2 "GND_L03_P015" (solid, pour order 15): 0,5 0,85 cw(c5,85) 5,90 90,90 cw(c90,85) 95,85 95,5 cw(c90,5) 90,0 5,0 cw(c5,5)
GND on INT1 "GND_L02_P016" (solid, pour order 16): 0,5 0,85 cw(c5,85) 5,90 90,90 cw(c90,85) 95,85 95,5 cw(c90,5) 90,0 5,0 cw(c5,5)

## Other copper
TOP:
  pour cut-out: 81.5,90 82.5,90 82.5,81.9 81.5,81.9

## Silkscreen, mask and mechanical layers (free items; w line width, h text height)
Top Overlay:
  drawing of 23 lines, arcs and shapes, not listed
  text "PoC_VCC" at 83.754,79.508 h1.52
  text "MFP8" at 7.2,77.82 h1
  text "-" at 79.254,76.492 h1.52
  text "MFP7" at 7.2,75.28 h1
  text "+" at 79.254,73 h1.52
  text "MFP5" at 7.2,72.74 h1
  text "MFP4" at 7.2,70.2 h1
  text "MFP3" at 7.2,67.66 h1
  text "LV_VCC" at 85.254,66.508 h1.52
  text "MFP2" at 7.2,65.12 h1
  text "-" at 79.254,63.492 h1.52
  text "MFP1" at 7.2,62.58 h1
  text "MFP0" at 7.2,60.04 h1
  text "+" at 79.254,60 h1.52
  text "nPWDN" at 7.2,57.5 h1
  text "MFP5" at 44.7,55 h1
  text "MFP4" at 44.7,53.5 h1
  text "3V3" at 89.754,53.254 h1.52
  text "3V3 BYPASS" at 68.5,52.434 h1
  text "MFP3" at 44.7,52 h1
  text "nPWDN" at 44.7,50.5 h1
  text "-" at 79.254,50.492 h1.52
  text "LO_VCC" at 68.535,49.883 h1
  text "3V3" at 70.535,47.2 h1
  text "+" at 79.254,47 h1.52
  text "SDA" at 71.534,42.8 h1
  text "CFG0" at 61.2,41.5 h1
  text "SCL" at 71.534,40.2 h1
  text "CFG1" at 61.2,40 h1
  text "MFP7" at 61.2,38.5 h1
  text "MFP2" at 44.7,38 h1
  text "CONF I2C" at 68.5,37.1 h1
  text "MFP8" at 61.2,37 h1
  text "MFP1" at 44.7,36.5 h1
  text "SDA" at 61.7,35.5 h1
  text "MFP0" at 44.7,35 h1
  text "SCL" at 61.7,34 h1
  text "CSI0A" at 80.2,17.999 h1 r270
  text "SDA" at 17.2,17.5 h1
  text "IO0" at 75.301,17.5 h1
  text "SDA SELECT" at 2.168,16.2 h1
  text "SDA SELECT" at 83.168,16.2 h1
  text "SCL" at 17.2,16 h1
  text "IO1" at 75.634,16 h1
  text "IO1" at 17.2,14.5 h1
  text "SCL" at 75.134,14.5 h1
  text "A" at 4.667,13.7 h1
  text "B" at 8.667,13.7 h1
  text "A" at 85.667,13.7 h1
  text "B" at 89.667,13.7 h1
  text "CSI1B" at 14.8,13.584 h1 r90
  text "IO0" at 17.2,13 h1
  text "SDA" at 75.134,13 h1
  text "CSI0B" at 80.2,11.999 h1 r270
  text "SDA" at 17.2,11.5 h1
  text "IO0" at 75.301,11.5 h1
  text "SCL SELECT" at 2.168,11.2 h1
  text "SCL SELECT" at 83.168,11.2 h1
  text "SCL" at 17.2,10 h1
  text "IO1" at 75.634,10 h1
  text "A" at 4.667,8.7 h1
  text "B" at 8.667,8.7 h1
  text "A" at 85.667,8.7 h1
  text "B" at 89.667,8.7 h1
  text "IO1" at 17.2,8.5 h1
  text "SCL" at 75.134,8.5 h1
  text "CSI1A" at 14.8,7.584 h1 r90
  text "IO0" at 17.2,7 h1
  text "SDA" at 75.134,7 h1
Bottom Overlay:
  text "MAX96724 EVAL" at 85,13 h5
  text "Project:" at 85.5,9.666 h2
  text "BRZ" at 66.65,9.333 h2
  text "V1" at 66.65,6 h2
  text "Revision:" at 85.5,6 h2
  text "09/12/2024" at 66.65,2.5 h2
  text "Date:" at 85.5,2.5 h2
Mechanical 1:
  the board outline again, w0.254